# Altium PCB PCB1.PcbDoc
Units mil, origin at the board's own origin, x right, y up, seen from the top; angles counter-clockwise.
Board outline 4260.63 x 2260.63 mil, 2 copper layers (Top Layer, Bottom Layer), stack 62.8 mil thick; 5 components, 18 nets, 86 pads, 2 vias.
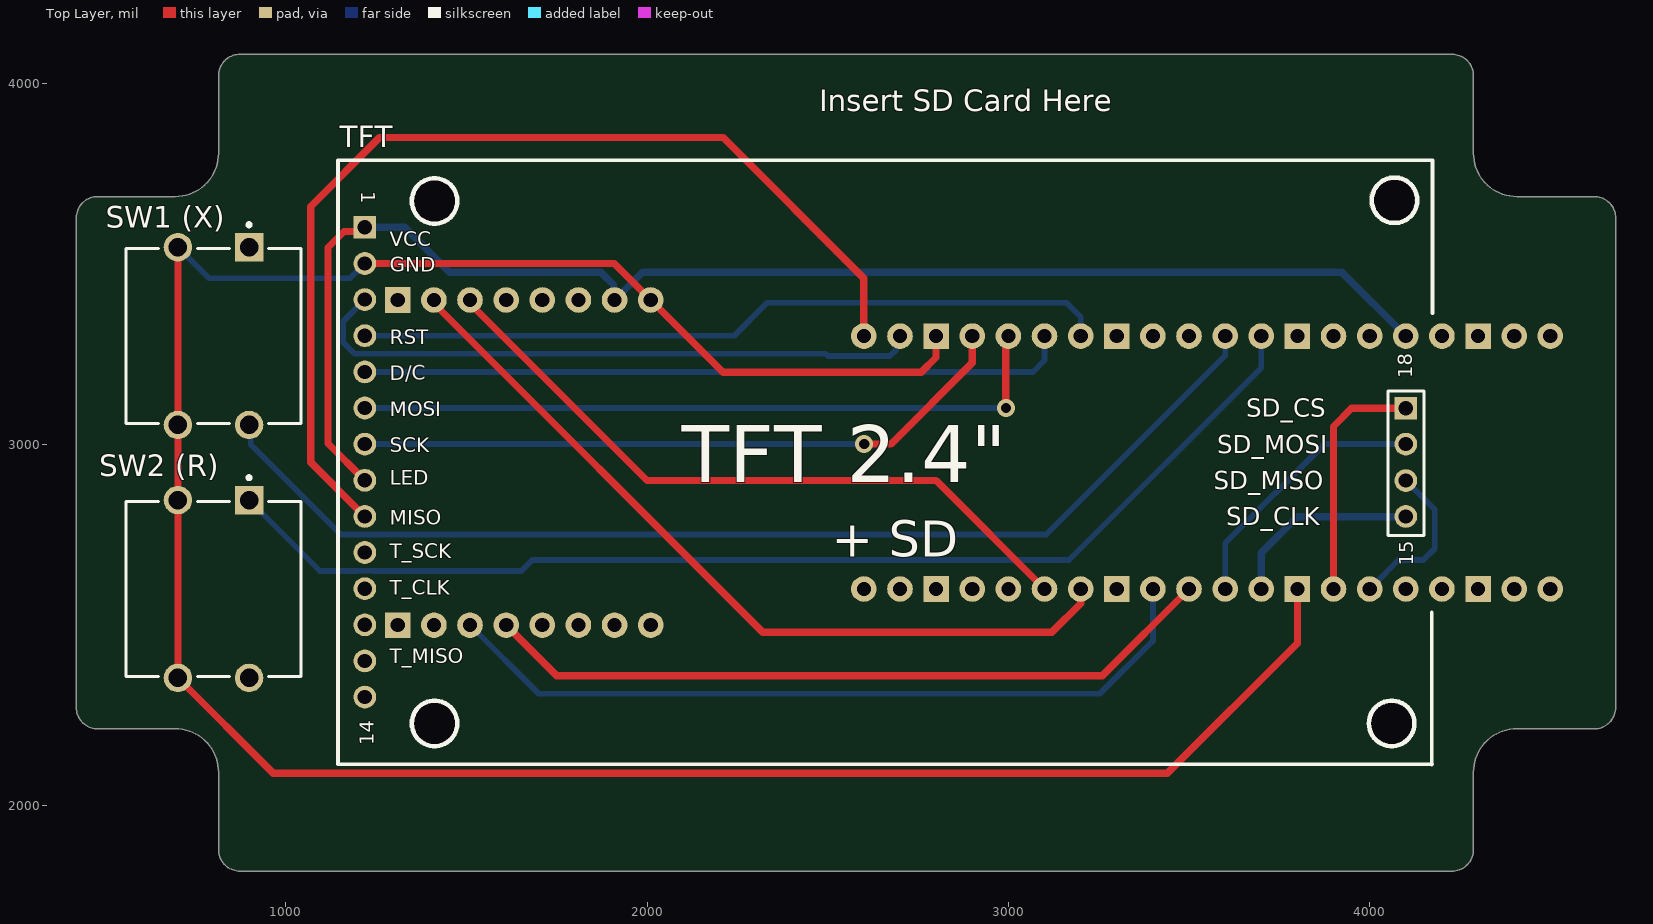
[diagram p0: Top Layer view]
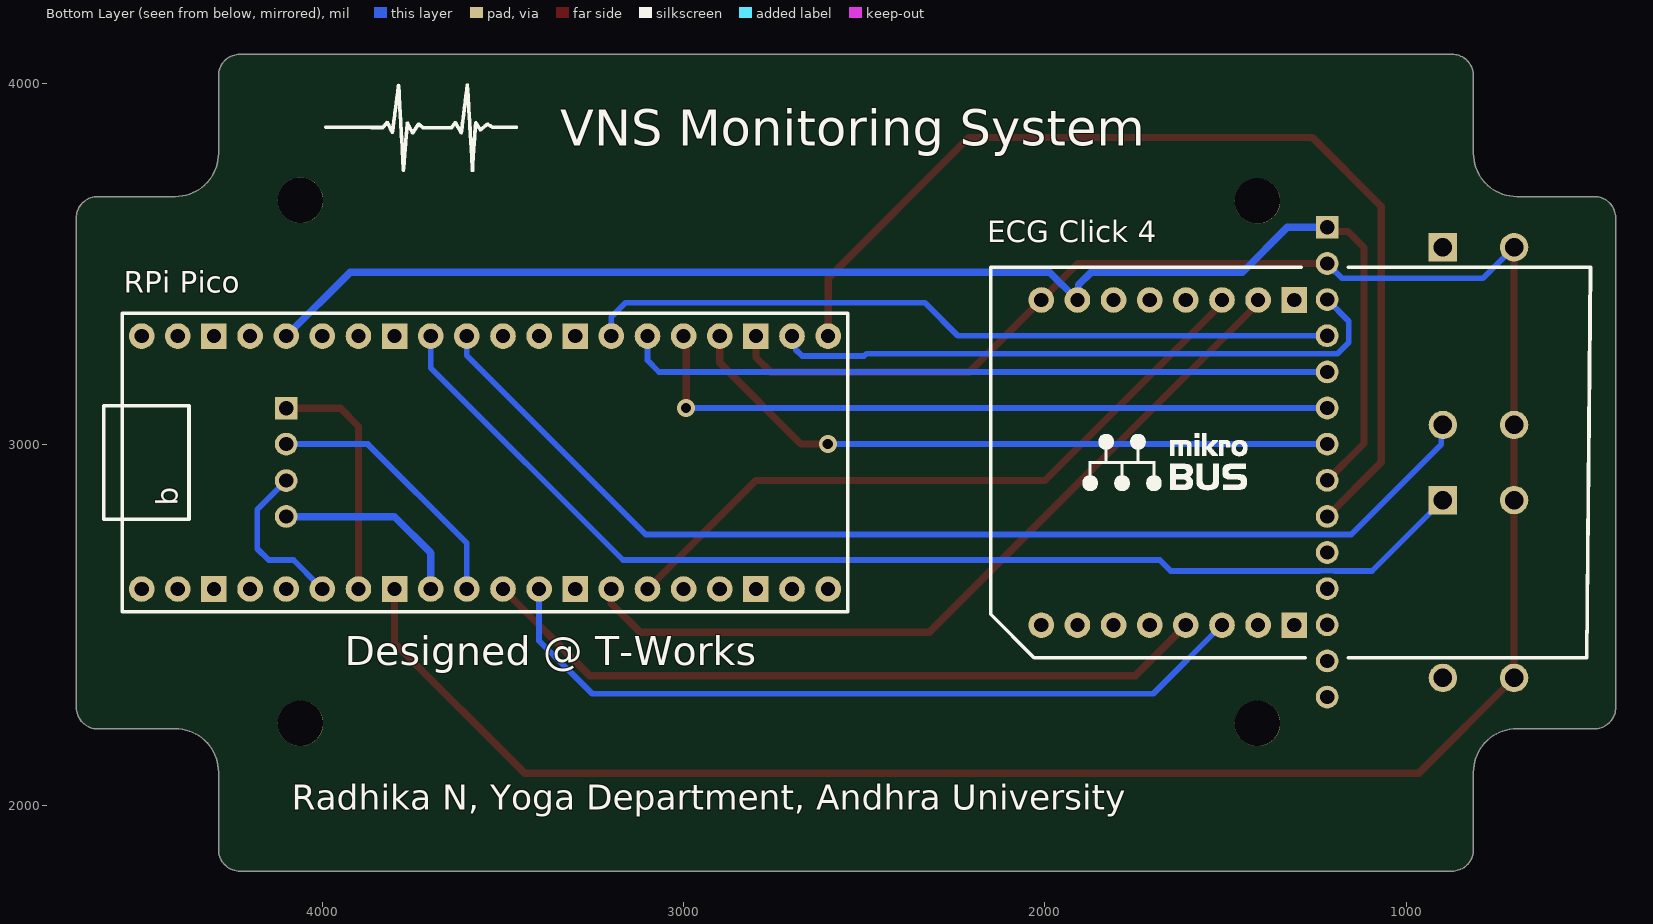
[diagram p1: Bottom Layer view, seen from below]
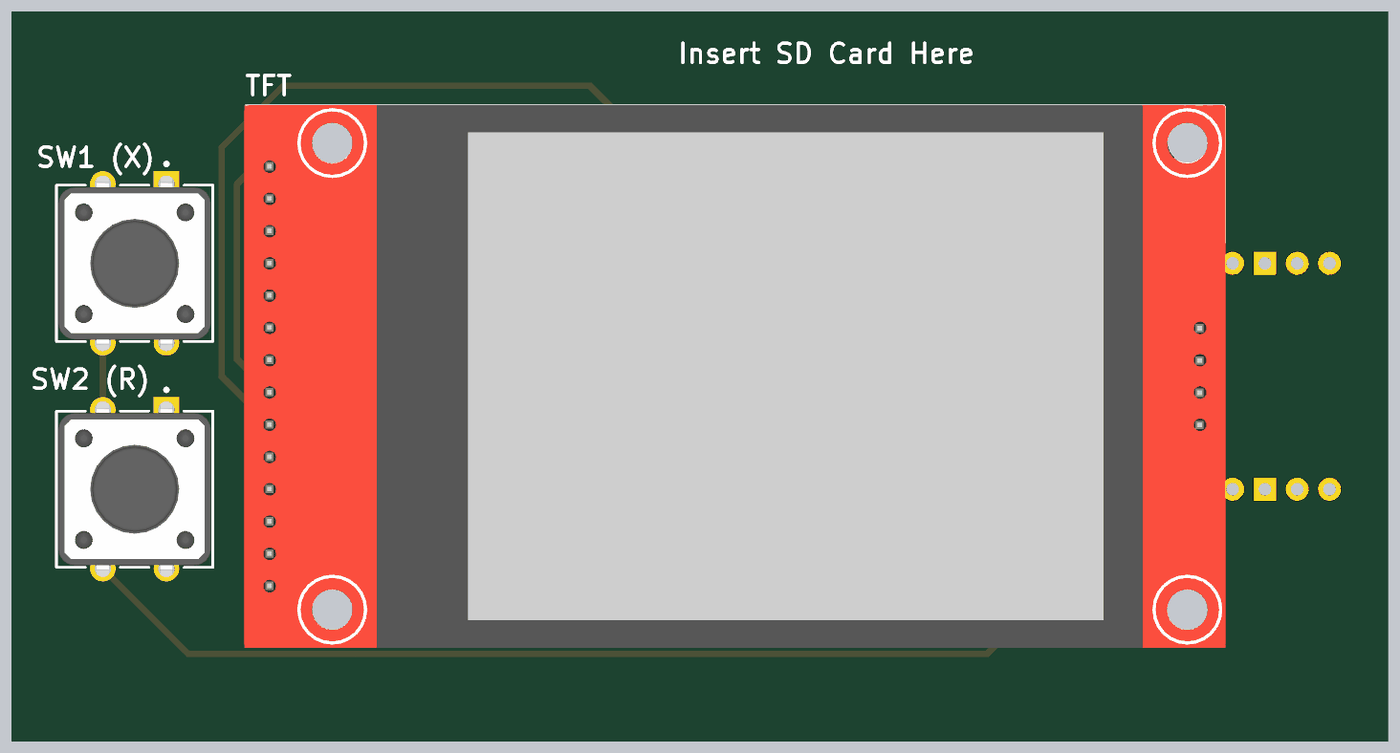
[diagram p2: 3D render of the assembled board from above, using the file's embedded part models]

## Layer stack, top to bottom
Top Solder: solder mask 0.4, Solder Resist, Dk 3.5
Top Layer: signal copper 1.4
Dielectric 1: dielectric 60, FR-4, Dk 4.8
Bottom Layer: signal copper 1.4
Bottom Solder: solder mask 0.4, Solder Resist, Dk 3.5

## Board outline
813.95,2093.26 ccw(c694.32,2093.32) 694.27,2212.95 479.31,2212.95 cw(c479.31,2272.01) 420.25,2272.01 420.25,3627.12 cw(c479.31,3627.12) 479.31,3686.18 694.26,3686.18 ccw(c694.32,3805.81) 813.95,3805.86 813.95,4020.82 cw(c873.01,4020.82) 873.01,4079.88 4228.12,4079.88 cw(c4228.12,4020.82) 4287.18,4020.82 4287.18,3805.86 ccw(c4406.81,3805.81) 4406.86,3686.18 4621.82,3686.18 cw(c4621.82,3627.12) 4680.88,3627.12 4680.88,2272.01 cw(c4621.82,2272.01) 4621.82,2212.95 4406.87,2212.95 ccw(c4406.81,2093.32) 4287.18,2093.27 4287.18,1878.31 cw(c4228.12,1878.31) 4228.12,1819.25 873.01,1819.25 cw(c873.01,1878.31) 813.95,1878.31

## Design rules (kind name [scope] priority, off if disabled: settings)
Clearance [All] p1: gap=10 ignorepadtopadclearanceinfootprint=FALSE
ComponentClearance [All] p1: gap=0 collisioncheckmode=3 verticalgap=0 showdistances=FALSE
HoleSize [All] p1: absolutevalues=TRUE maxlimit=200 minlimit=1 maxpercent=80.000 minpercent=20.000
PolygonConnect [All] p1: connectstyle=Relief reliefconductorwidth=10 reliefentries=4 polygonreliefangle="90 Angle" airgapwidth=10
RoutingVias [All] p1: holewidth=28 width=50 viastyle="Through Hole" minholewidth=28 minwidth=50 maxholewidth=28 maxwidth=50
SilkToSilkClearance [All] p1: silktosilkclearance=0
SolderMaskExpansion [All] p1: expansion=4 istentingtop=FALSE
SupplyNets "Schematic Supply Nets_3" [InNet('GND')] p1: voltage=0.000
SupplyNets "Schematic Supply Nets_2" [InNet('3V3')] p2: voltage=0.000
Width [All] p1: maxlimit=20 minlimit=10 preferedwidth=20
27 further rules are at their usual default settings.

## Components (designator, comment, footprint, x,y, rotation, side; value= is the part's Value field where it differs from the comment)
"ECG Click 4" "Mikroe ECG 4 Click" "Mikroe ECG 4 Click-Footprint-1" 1655,2950 r270 bottom (schematic designator I2)
"RPi Pico" "Pi Pico" "Pi Pico-Footprint-1" 2547.07,2536.62 r90 bottom (schematic designator U1)
"SW1 (X)" "FSM100" FP-FSM100-MFG 800,3300 r270 top (schematic designator SW1)
"SW2 (R)" "FSM100" FP-FSM100-MFG 800,2600 r270 top (schematic designator SW2)
TFT "2.4in TFT LCD ILI9341 320x240" "2.4in TFT LCD ILI9341 320x240-Footprint-1" 1139.46,2109.8 r0 top (schematic designator U3)

## Footprints (in the part's own frame and the unit in brackets; to place one, negate y for a bottom-side part, rotate by r counter-clockwise, add the part's x,y. Pads: shape width x height; smd on the part's side, far side on the other; paste and mask are expansions set on the pad)
"2.4in TFT LCD ILI9341 320x240-Footprint-1" [mm]
  rect 1.6x1.6 hole 1 paste-2539.97 mask+0.102: 1(2.014,37.875) 18(75.198,25.151)
  round 1.6 hole 1 paste-2539.97 mask+0.102: 2(2.014,35.335) 3(2.014,32.795) 4(2.014,30.255) 5(2.014,27.715) 6(2.014,25.175) 7(2.014,22.635) 8(2.014,20.095) 9(2.014,17.555) 10(2.014,15.015) 11(2.014,12.475) 12(2.014,9.935) 13(2.014,7.395) 14(2.014,4.855) 15(75.199,17.555) 16(75.198,20.07) 17(75.198,22.635)
  round 3.2 hole 3.2 unplated paste-2539.97: ""(6.916,3.001) ""(6.916,39.729) ""(74.201,3.001) ""(74.201,39.78)
  silkscreen extent 0.13,0.13 77.05,42.6, body extent 0,-0.02 77.18,42.7, height 8.54
FP-FSM100-MFG [mm]
  rect 2x2 hole 1.3 paste-2539.97 mask+0: 1(-6.25,2.5)
  round 2 hole 1.3 paste-2539.97 mask+0: 2(6.25,2.5) 3(-6.25,-2.5) 4(6.25,-2.5)
  silkscreen extent -7.95,-6.15 6.15,6.15, body extent -7.35,-6.25 7.35,6.25, height 0.25
"Mikroe ECG 4 Click-Footprint-1" [mm]
  rect 1.8x1.8 hole 1 paste-2539.97 mask+0.051: 1(-11.43,8.763) 16(11.43,8.763)
  round 1.8 hole 1 paste-2539.97 mask+0.051: 2(-11.43,6.223) 3(-11.43,3.683) 4(-11.43,1.143) 5(-11.43,-1.397) 6(-11.43,-3.937) 7(-11.43,-6.477) 8(-11.43,-9.017) 9(11.43,-9.017) 10(11.43,-6.477) 11(11.43,-3.937) 12(11.43,-1.397) 13(11.43,1.143) 14(11.43,3.683) 15(11.43,6.223)
  silkscreen extent -2.01,-6.11 1.99,5.47, body extent -13.73,-11.97 13.73,10.92, height 11.01
"Pi Pico-Footprint-1" [mm]
  round 1.8 hole 1 paste-2539.97 mask+0.051: 1(1.61,49.605) 2(1.61,47.065) 4(1.61,41.985) 5(1.61,39.445) 6(1.61,36.905) 7(1.61,34.365) 9(1.61,29.285) 10(1.61,26.745) 11(1.61,24.205) 12(1.61,21.665) 14(1.61,16.585) 15(1.61,14.045) 16(1.61,11.505) 17(1.61,8.965) 19(1.61,3.885) 20(1.61,1.345) 21(19.39,1.345) 22(19.39,3.885) 24(19.39,8.965) 25(19.39,11.505) 26(19.39,14.045) 27(19.39,16.585) 29(19.39,21.665) 30(19.39,24.205) 31(19.39,26.745) 32(19.39,29.285) 34(19.39,34.365) 35(19.39,36.905) 36(19.39,39.445) 37(19.39,41.985) 39(19.39,47.065) 40(19.39,49.605)
  rect 1.8x1.8 hole 1 paste-2539.97 mask+0.051: 3(1.61,44.525) 8(1.61,31.825) 13(1.61,19.125) 18(1.61,6.425) 23(19.39,6.425) 28(19.39,19.125) 33(19.39,31.825) 38(19.39,44.525)
  silkscreen extent 0,-0.03 21,52.27

## Part data
"ECG Click 4": library part CMP-00003-3
"RPi Pico": library part CMP-00002-2
"SW1 (X)" "SW2 (R)": library part CMP-03402-000014-1, "SWITCH TACTILE SPST-NO 0.05A 24V", Actuator Color=Black, Contact Current Rating=50mA, Contact Resistance=100mR, Max Operating Temperature=85°C, Max Voltage Rating (DC)=12V, Min Operating Temperature=-35°C, Operating Force=1.57N, Package Quantity=400, Voltage Rating (DC)=24V, Actuator Length=6.35mm, Actuator Material=Polyester, Actuator Type=Standard, Contact Material="Copper Alloy", Contact Plating=Silver, Contact Type="1 maker", Current Rating=50mA, Depth=12.5mm, Electrical Life=100000Cycles, ELV=Compliant, Illumination Type=Non-Illuminated, Lead Free="Lead Free", Length=12mm, Max Current Rating=50mA, Mechanical Life=100000Cycles, Mount="Through Hole", Orientation=Straight, Packaging="Loose Piece", RoHS Compliant=Yes, Series="FSM100 ~ 104", Switch Function=Off-Mom, Switch Travel=0.3mm, Termination="PC Pins", Throw Configuration=SPST, Type=Switch
TFT: library part CMP-00000-3

## Via types
v1: diameter 50, hole 28, Top Layer to Bottom Layer, 2 vias

## Nets (pads, with @x,y where several pads share a name; then routed paths per layer and width w, separated by ;. In a path a pad name is that pad's centre, name@x,y a point inside that pad or via, vN(x,y) a via of type N, cw(c..) or ccw(c..) an arc to the next point about the centre after c; other vN are vias at no path point)
3V3: "ECG Click 4.7" "RPi Pico.36" TFT.1 TFT.8 | length 3895.7
  Top Layer w20: TFT.1@1210,3600 1210,3598.28 1201.19,3589.48 1161.19,3589.48 1117,3545.28 1117,3002.69 TFT.8
  Bottom Layer w20: TFT.1 1329,3600.94 1452.94,3477 1872,3477 1907.07,3441.93 1907.07,3402.93 1910,3400 1987,3477 3923,3477 4100,3300
BTN1: "RPi Pico.31" "SW1 (X).2" | length 3115
  Bottom Layer w16: 898.43,3053.94 902.8,3049.56 902.8,3000.2 1152,2751 3105,2751 3600,3246 3600,3300
BTN2: "RPi Pico.32" "SW2 (R).1" | length 3203.9
  Bottom Layer w16: 898.43,2846.06 1094.49,2650 1197.8,2650 1198.24,2650.44 1239.25,2650.44 1239.69,2650 1652,2650 1682,2680 3168,2680 3700,3212 3700,3300
ECG_CS: "ECG Click 4.3" "RPi Pico.15" | length 1927.2
  Top Layer w20: 1510,3400 1510,3390 2000,2900 2800,2900 3100,2600
ECG_RST: "ECG Click 4.2" "RPi Pico.14" | length 2230.1
  Top Layer w20: 1410,3400 1410,3390 2320,2480 3120,2480 3200,2560 3200,2580
ECG_RX: "ECG Click 4.14" "RPi Pico.12" | length 2172.6
  Bottom Layer w16: 1510,2500 1700,2310 3253,2310 3400,2457 3400,2600
ECG_TX: "ECG Click 4.13" "RPi Pico.11" | length 2047.4
  Top Layer w20: 1610,2500 1750,2360 3260,2360 3500,2600
GND: "ECG Click 4.8" "RPi Pico.8" "RPi Pico.23" "SW1 (X).3" "SW1 (X).4" "SW2 (R).3" "SW2 (R).4" TFT.2 | length 7046.4
  Top Layer w20: 701.57,3546.06 701.57,3053.94 701.57,2846.06 701.57,2353.94 965.51,2090 3440,2090 3800,2450 3800,2600 ; TFT.2 1909.05,3500.95 2010,3400 2210,3200 2759,3200 2800,3241 2800,3300.35
  Bottom Layer w16: 701.57,3546.06 787.64,3460 1177.8,3460 1210,3492.2 TFT.2@1210,3500
SD_CS: "RPi Pico.7" TFT.18 | length 670.7
  Top Layer w20: 3900,2600 3900,3050 3950,3100 TFT.18
SD_MISO: "RPi Pico.6" TFT.16 | length 443.5
  Bottom Layer w16: 4000,2610 4010,2610 4080,2680 4148.28,2680 4180,2711.72 4180,2819.96 TFT.16
SD_MOSI: "RPi Pico.10" TFT.17 | length 740.5
  Bottom Layer w16: 3600,2600 3600,2727 3873.95,3000.95 TFT.17
SD_SCK: "RPi Pico.9" TFT.15 | length 541.9
  Bottom Layer w20: 3700,2600 3700,2700 3800,2800 4099.09,2800 TFT.15
TFT_CLK: "RPi Pico.24" TFT.7 | length 1848.5
  Top Layer w20: v1(2600.95,3000.95) 2674.95,3000.95 2900,3226 2900,3300
  Bottom Layer w16: TFT.7 v1(2600.95,3000.95)
TFT_CS: "RPi Pico.22" TFT.3 | length 1739
  Bottom Layer w16: TFT.3 1159,3341.2 1159,3282 1190,3251 2494,3251 2500.43,3244.57 2671.59,3244.57 2689.5,3262.48 2689.5,3289.5 2700,3300
TFT_DC: "RPi Pico.26" TFT.5 | length 1961.5
  Bottom Layer w16: TFT.5 3067.95,3200.95 3100,3233 3100,3300
TFT_MISO: "RPi Pico.21" TFT.9 | length 2851.7
  Top Layer w20: TFT.9 1069,2950.69 1069,3659 1260,3850 2210,3850 2600,3460 2600,3300
TFT_MOSI: "RPi Pico.25" TFT.6 | length 1976.2
  Top Layer w20: v1(2992.95,3100.95) 2992.95,3292.94 3000,3300
  Bottom Layer w16: TFT.6 v1(2992.95,3100.95)
TFT_RST: "RPi Pico.27" TFT.4 | length 2088.1
  Bottom Layer w16: TFT.4 2240.95,3300.95 2332,3392 3161,3392 3200,3353 3200,3300
pads on no net: "ECG Click 4.1" "ECG Click 4.4" "ECG Click 4.5" "ECG Click 4.6" "ECG Click 4.9" "ECG Click 4.10" "ECG Click 4.11" "ECG Click 4.12" "ECG Click 4.15" "ECG Click 4.16" "RPi Pico.1" "RPi Pico.2" "RPi Pico.3" "RPi Pico.4" "RPi Pico.5" "RPi Pico.13" "RPi Pico.16" "RPi Pico.17" "RPi Pico.18" "RPi Pico.19" "RPi Pico.20" "RPi Pico.28" "RPi Pico.29" "RPi Pico.30" "RPi Pico.33" "RPi Pico.34" "RPi Pico.35" "RPi Pico.37" "RPi Pico.38" "RPi Pico.39" "RPi Pico.40" "SW1 (X).1" "SW2 (R).2" TFT. TFT.10 TFT.11 TFT.12 TFT.13 TFT.14

## Silkscreen, mask and mechanical layers (free items; w line width, h text height)
Top Overlay:
  lines w10: 4172,2114 4172,2536 ; 4174,3364 4174,3787
  text "Insert SD Card Here" at 2477,3922 h60
Bottom Overlay:
  drawing of 8 lines, arcs and shapes, not listed
  text "VNS Monitoring System" at 3342,3827.32 h100
  text "b" at 4400.06,2829.94 h60 r269.65
  text "Designed @ T-Works" at 3938,2388.66 h80
  text "Radhika N, Yoga Department, Andhra University" at 4084,1989.33 h70

## Text inside footprints (layer, text, board x,y; h text height)
TFT: Top Overlay "TFT 2.4\"" at 2095.75,2895.75 h157.48; Top Overlay "+ SD" at 2510.81,2689.81 h100; Top Overlay "VCC" at 1288,3548 h40; Top Overlay "GND" at 1288,3478 h40; Top Overlay "RST" at 1288,3278 h40; Top Overlay "D/C" at 1287.92,3178.08 h40 r0.58; Top Overlay "MOSI" at 1288,3078 h40; Top Overlay "SCK" at 1288,2978 h40; Top Overlay "LED" at 1288,2888 h40; Top Overlay "MISO" at 1288,2778 h40; Top Overlay "T_SCK" at 1288,2684.66 h40; Top Overlay "T_CLK" at 1288,2584.66 h40; Top Overlay "T_MISO" at 1288,2394.66 h40; Top Overlay "SD_CS" at 3658,3076.33 h50; Top Overlay "SD_MOSI" at 3578,2976.33 h50; Top Overlay "SD_MISO" at 3568,2876.33 h50; Top Overlay "SD_CLK" at 3603.54,2776.29 h50; Top Overlay "15" at 4121.01,2664.99 h39.37 r90; Top Overlay "18" at 4118,3183 h39.37 r90; Top Overlay "14" at 1244,2168 h39.37 r90; Top Overlay "1" at 1209.06,3700.94 h39.37 r270